# Altium PCB PCB1.PcbDoc
Units mm, origin at the board's own origin, x right, y up, seen from the top; angles counter-clockwise.
Board outline 59 x 38 mm, 4 copper layers (Top Layer, Int1 (GND), Int2 (PWR), Bottom Layer), stack 1.585 mm thick; 55 components, 40 nets, 219 pads, 132 vias.
Unrouted connection lines stored in the file: 2.
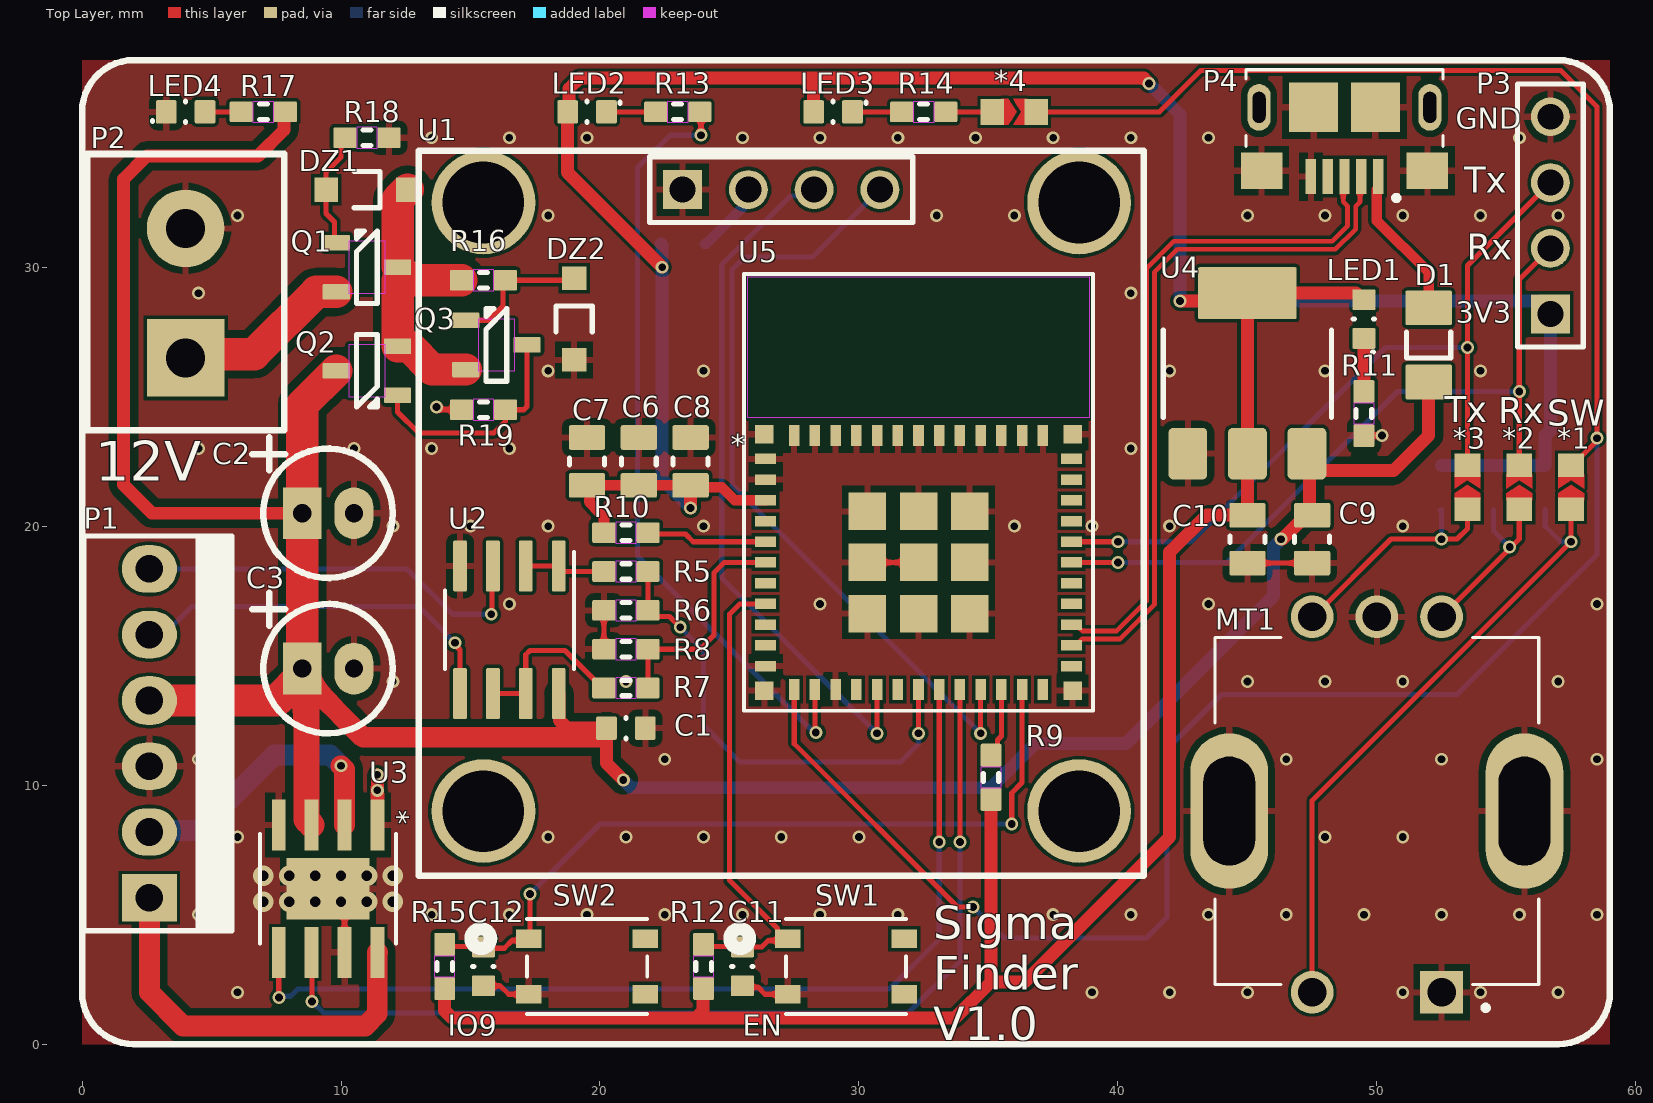
[diagram p0: Top Layer view]
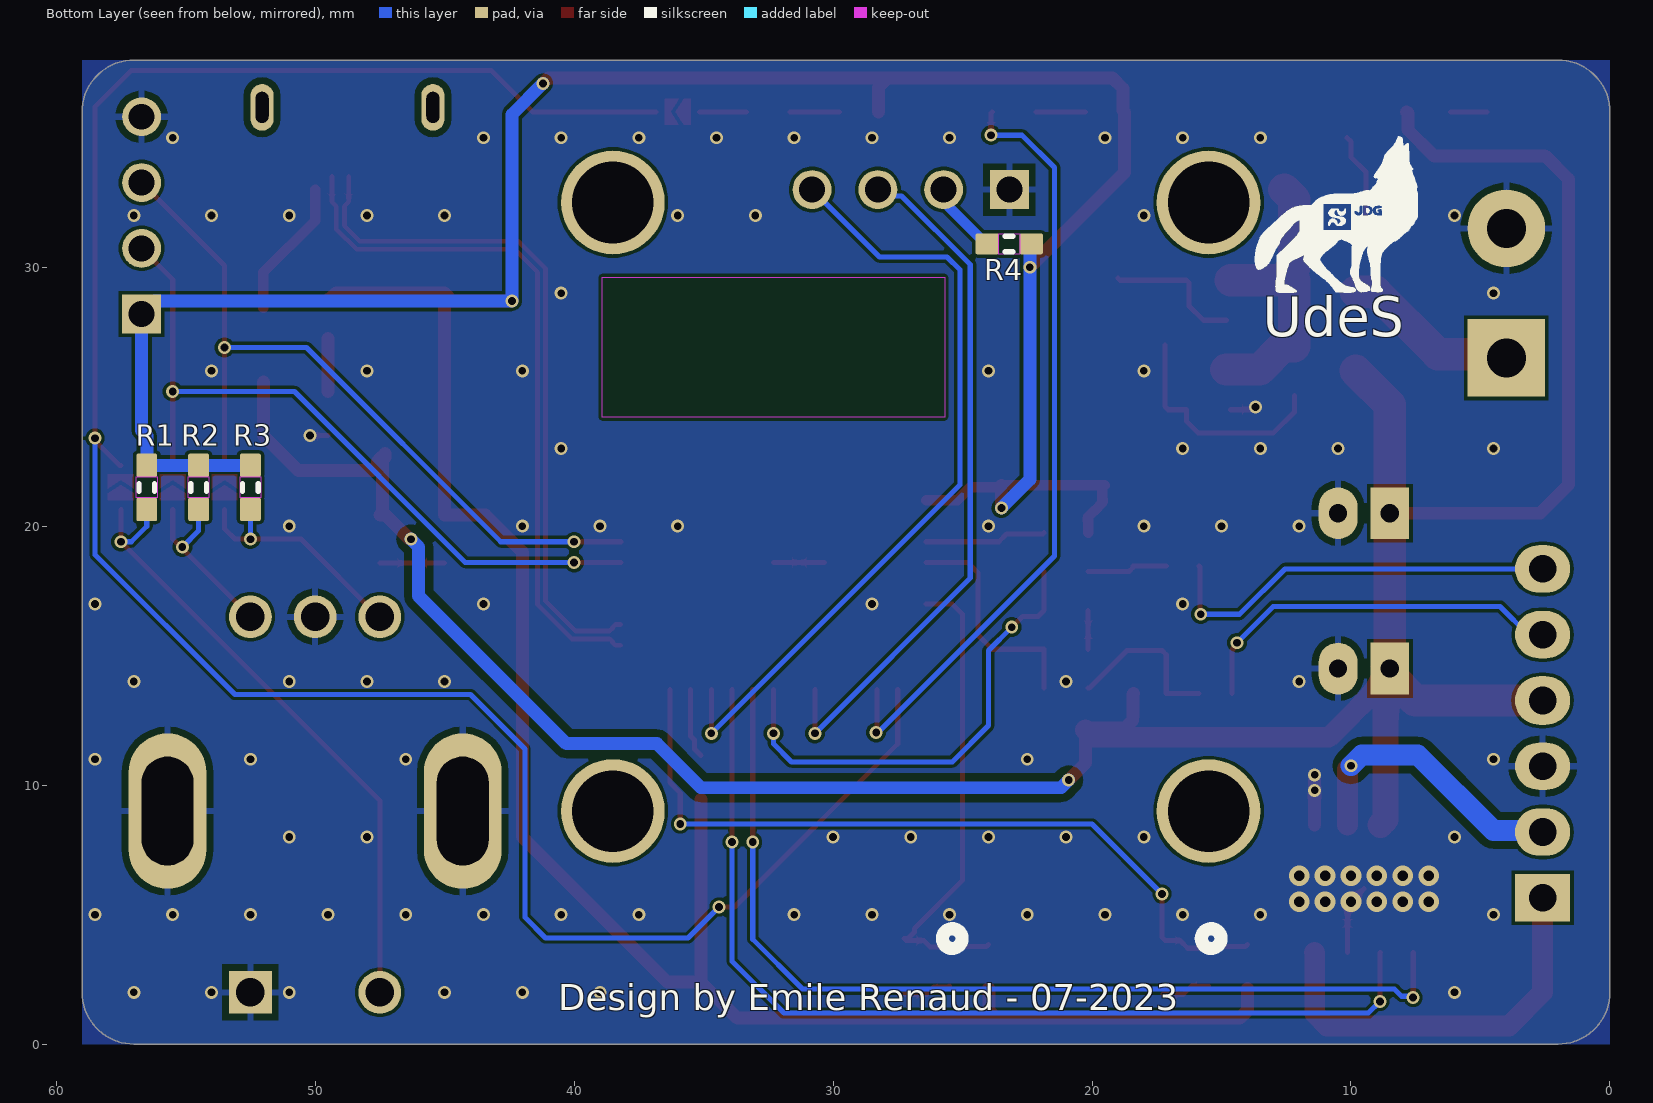
[diagram p1: Bottom Layer view, seen from below]
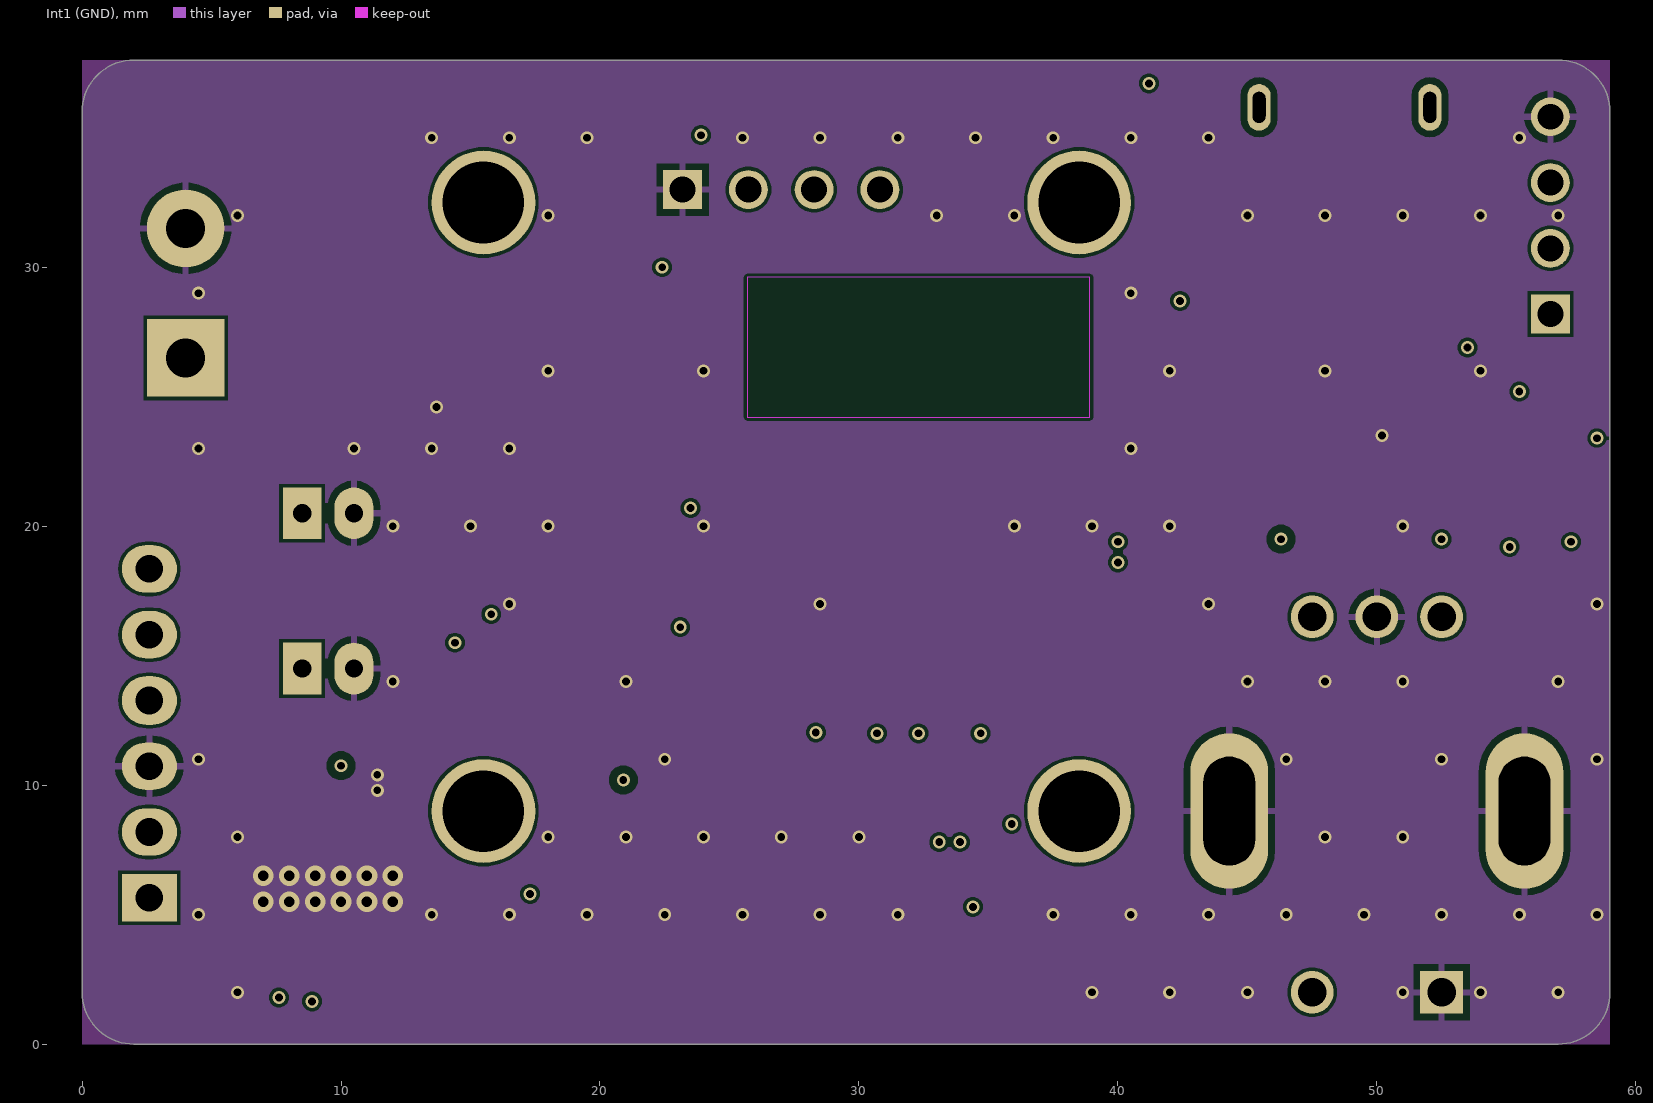
[diagram p2: Int1 (GND)]
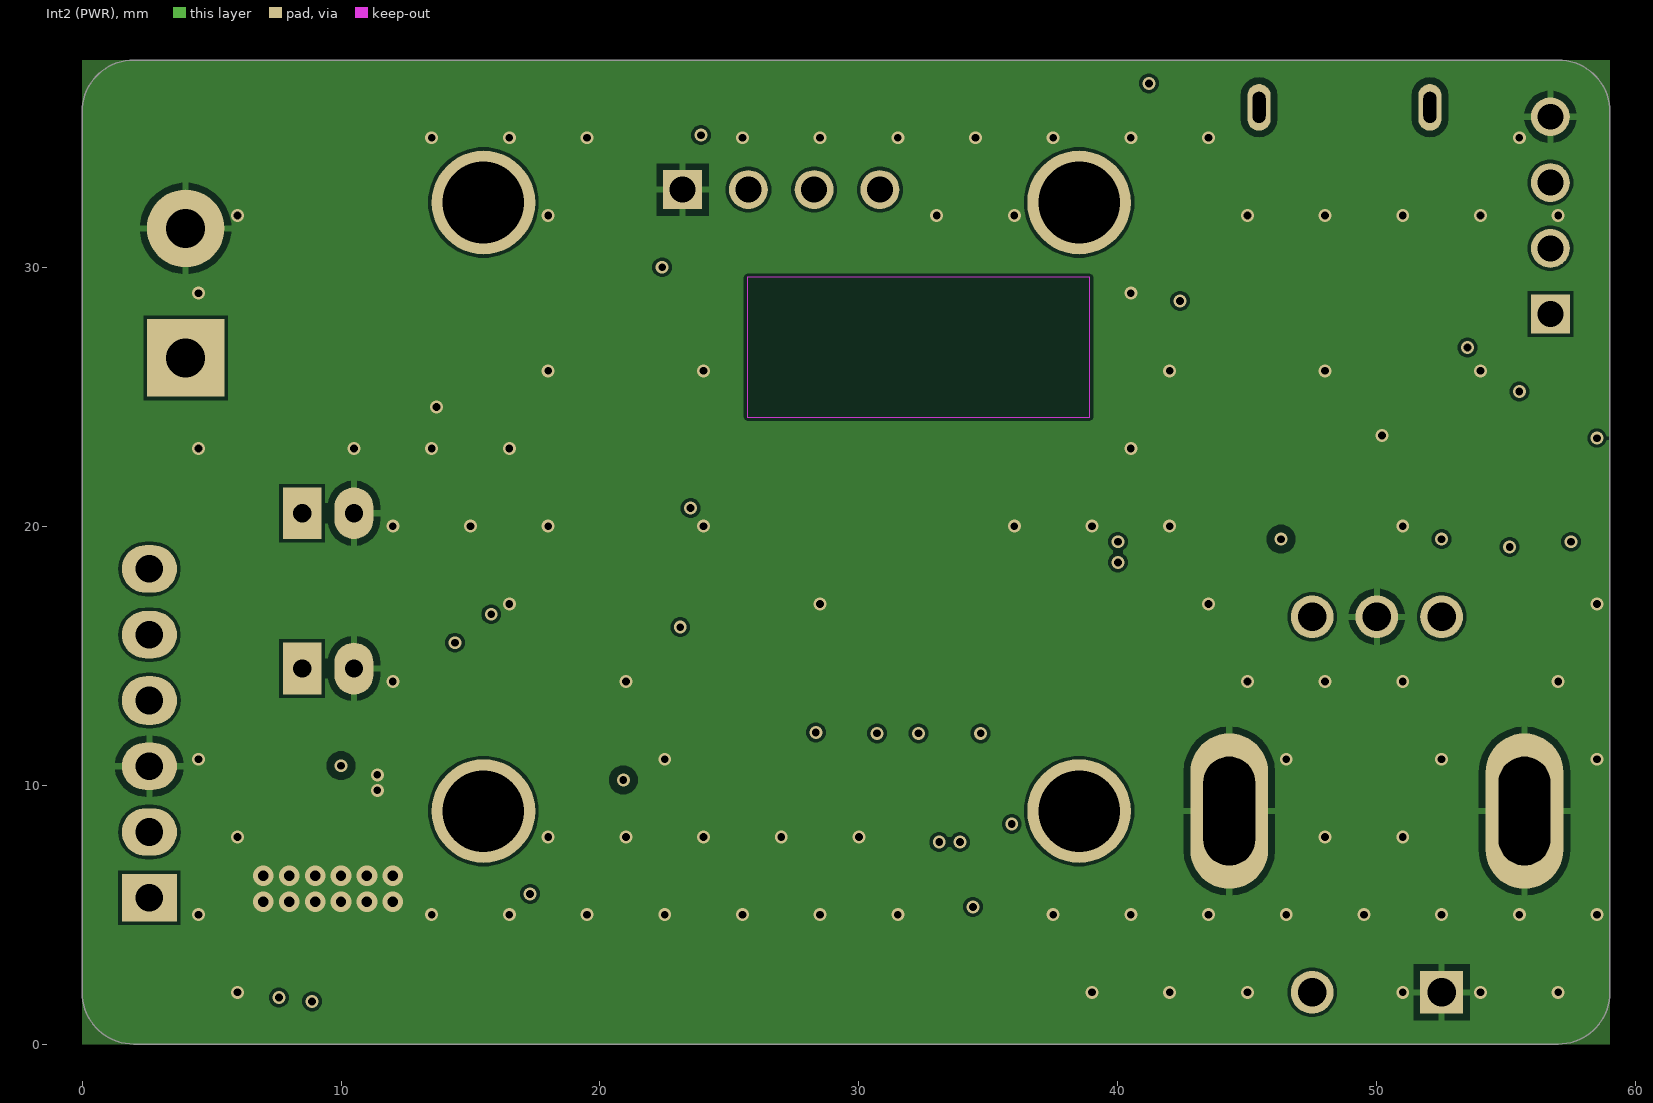
[diagram p3: Int2 (PWR)]
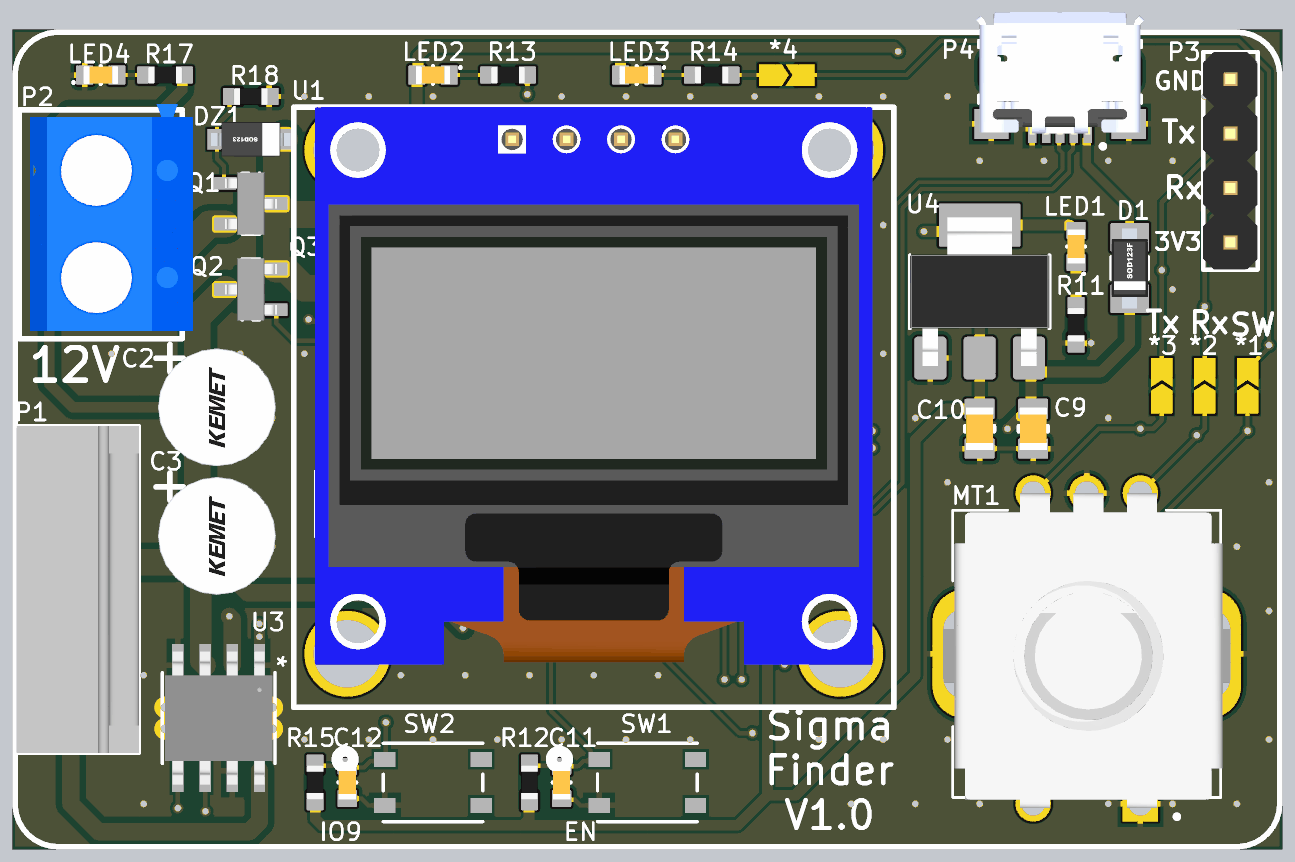
[diagram p4: 3D render of the assembled board from above, using the file's embedded part models]
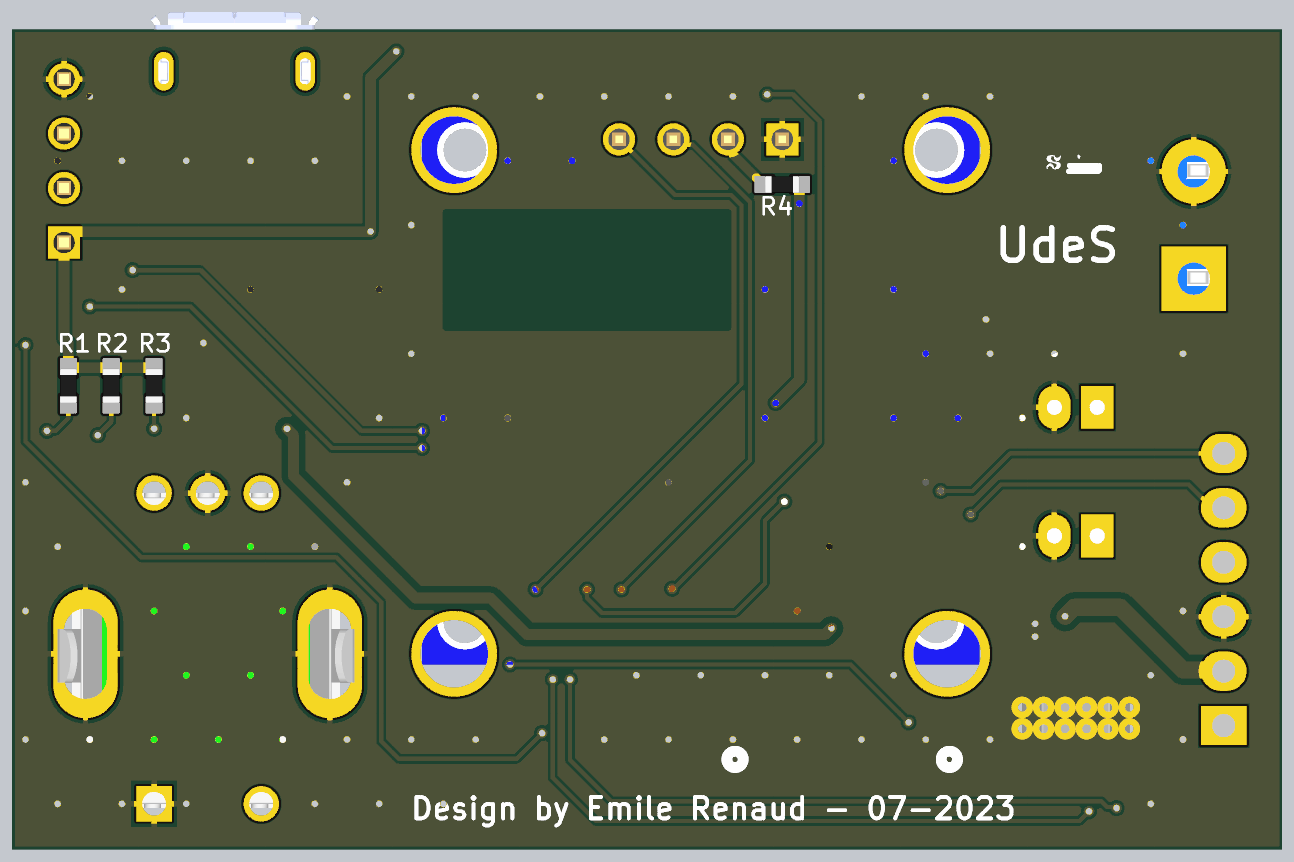
[diagram p5: 3D render of the assembled board from below, using the file's embedded part models]

## Layer stack, top to bottom
Top Solder: solder mask 0.035, SM-001, Dk 4
Top Layer: signal copper 0.035
Dielectric 2: prepreg 0.21, PP-017, Dk 4.6
Int1 (GND): signal copper 0.015
Dielectric 3: core 1.065, Core-039, Dk 4.6
Int2 (PWR): signal copper 0.015
Dielectric 4: prepreg 0.21, PP-017, Dk 4.6
Bottom Layer: signal copper 0.035
Bottom Solder: solder mask 0.035, SM-001, Dk 4

## Board outline
0,2 0,36 cw(c2,36) 2,38 57,38 cw(c57,36) 59,36 59,2 cw(c57,2) 57,0 2,0 cw(c2,2)

## Design rules (kind name [scope] priority, off if disabled: settings)
Clearance Clearance_Power [InNetClass('Power')] p1: gap=0.3 ignorepadtopadclearanceinfootprint=FALSE except(0.127: SMDPad-SMDPad SMDPad-THPad SMDPad-Via SMDPad-Fill SMDPad-Poly SMDPad-Region SMDPad-Text SMDPad-Hole THPad-THPad THPad-Via THPad-Fill THPad-Poly THPad-Region THPad-Text THPad-Hole)
Clearance Clearance_signal [All] p2: gap=0.125 ignorepadtopadclearanceinfootprint=FALSE
ComponentClearance [All] p1 off: gap=0.254 collisioncheckmode=3 verticalgap=0.254 showdistances=FALSE
DiffPairsRouting [InDifferentialPair('USB')] p1: maxlimit=0.254 minlimit=0.127 mostfreqgap=0.254 toplayer_maxgap=0.127 toplayer_prefgap=0.127 toplayer_minwidth=0.182 toplayer_maxwidth=0.182 toplayer_prefwidth=0.182 bottomlayer_maxgap=0.127 bottomlayer_prefgap=0.127 bottomlayer_minwidth=0.182 bottomlayer_maxwidth=0.182 bottomlayer_prefwidth=0.182 impedanceprofiledriven=TRUE impedanceprofileid={FA6609CF-BA32-4F74-B84B-CE5609EF71AF} impedanceprofilevalue=90.000000 maxuncoupledlength=12.7
HoleSize [All] p1 off: absolutevalues=TRUE maxlimit=2.54 minlimit=0.025 maxpercent=80.000 minpercent=20.000
MinimumSolderMaskSliver [All] p1 off: minsoldermaskwidth=0.254
PasteMaskExpansion [All] p1 off: expansion=0
PolygonConnect PolygonConnect_Power [InNetClass('Power')] p1: connectstyle=Direct reliefconductorwidth=0.254 reliefentries=4 polygonreliefangle="90 Angle" airgapwidth=0.254
PolygonConnect [All] p2: thpad.connectstyle=Relief thpad.reliefconductorwidth=0.254 thpad.reliefentries=4 thpad.polygonreliefangle="90 Angle" thpad.airgapwidth=0.254 smdpad.connectstyle=Relief smdpad.reliefconductorwidth=0.254 smdpad.reliefentries=4 smdpad.polygonreliefangle="90 Angle" smdpad.airgapwidth=0.254 via.connectstyle=Direct via.reliefconductorwidth=0.254 via.reliefentries=4 via.polygonreliefangle="90 Angle" via.airgapwidth=0.254
RoomDefinition main [InComponentClass('main')] p1: confinementstyle=ConfineIn formatcopy=TRUE lockcomponents=FALSE outline 122,-31 501,-31 501,10 122,10
RoutingVias [All] p1: holewidth=0.3 width=0.5 viastyle="Through Hole" minholewidth=0.15 minwidth=0.25 maxholewidth=1 maxwidth=1.3
SilkToSolderMaskClearance [IsPad] p1 off: minsilkscreentomaskgap=0.254 clearancetoexposedcopper=TRUE
SolderMaskExpansion [All] p1 off: expansion=0.102 istentingtop=FALSE
Width Width_Power(5A) [InNetClass('Power')] p1: maxlimit=2 minlimit=0.5 preferedwidth=1.25 minimp=50.000000 maximp=50.000000 favimp=50.000000
Width Width_signal [All] p2: maxlimit=1 minlimit=0.1 preferedwidth=0.2 minimp=50.000000 maximp=50.000000 favimp=50.000000
24 further rules are at their usual default settings.

## Classes and differential pairs
net class Power: +12 MOTOR_OUT_A6 MOTOR_OUT_B6 NetDZ1_2 NetP2_1
differential pair USB: +USB_P -USB_N

## Components (designator, comment, footprint, x,y, rotation, side; value= is the part's Value field where it differs from the comment)
*1 "NetTie_0603_Short" NetTie-0603-short 57.5,21.5 r270 top
*2 "NetTie_0603_Short" NetTie-0603-short 55.5,21.5 r270 top
*3 "NetTie_0603_Short" NetTie-0603-short 53.5,21.5 r270 top
*4 "NetTie_0603_Short" NetTie-0603-short 36,36 r180 top
C1 "Capacitor-0603-0.1uF-50V-X7R" CAPACITOR-0603 21,12.2 r180 top value=0.1uF
C2 "CAP ALUM 100UF 20% 25V RADIAL" CAPACITOR-Aluminium-5x11mm-2mmPitch 9.5,20.5 r90 top value=100uF
C3 "CAP ALUM 100UF 20% 25V RADIAL" CAPACITOR-Aluminium-5x11mm-2mmPitch 9.5,14.5 r90 top value=100uF
C6 "Capacitor-0805-10uF-35V-X5R" CAPACITOR-0805 21.5,22.5 r270 top value=10uF
C7 "Capacitor-0805-10uF-35V-X5R" CAPACITOR-0805 19.5,22.5 r270 top value=10uF
C8 "Capacitor-0805-10uF-35V-X5R" CAPACITOR-0805 23.5,22.5 r270 top value=10uF
C9 "Capacitor-0805-10uF-35V-X5R" CAPACITOR-0805 47.5,19.5 r90 top value=10uF
C10 "Capacitor-0805-10uF-35V-X5R" CAPACITOR-0805 45,19.5 r90 top value=10uF
C11 "Capacitor-0603-1uF-25V-X5R" CAPACITOR-0603 25.5,3 r90 top value=1uF
C12 "Capacitor-0603-1uF-25V-X5R" CAPACITOR-0603 15.5,3 r90 top value=1uF
D1 "SMD110PL-TP" SOD-123F 52,27 r270 top
DZ1 "BZT52C6V2-TP" SOD-123 11,33 r0 top
DZ2 "BZT52C13-TP" SOD-123 19,28 r90 top
LED1 "B1911USD-20D000114U1930" LED-0603-2PIN 49.5,28 r90 top
LED2 "B1911USD-20D000114U1930" LED-0603-2PIN 19.5,36 r180 top
LED3 "B1911USD-20D000114U1930" LED-0603-2PIN 29,36 r180 top
LED4 "B1911USD-20D000114U1930" LED-0603-2PIN 4,36 r0 top
MT1 "Rotary Encoder" XDCR_PEC11R-4215F-S0024 50,9 r180 top
P1 "640454-6" 640454-6 2.6,12 r90 top
P2 "2pos-TH-5.0mm" "Weco 2" 4,29 r90 top
P3 "UART" HDR1X4 56.7,32 r90 top
P4 "CONN RCPT USB2.0 MICRO B SMD R/A" FCI_10118193-0001LF 48.75,36.175 r180 top
Q1 "SSM3J332R" SOT-23-3 11,30 r270 top
Q2 "SSM3J332R" SOT-23-3 11,26 r90 top
Q3 "SSM3J332R" SOT-23-3 16,27 r270 top
R1 "SMT resistor" Resistor-0603 56.5,21.5 r270 bottom value=10k
R2 "SMT resistor" Resistor-0603 54.5,21.5 r270 bottom value=10k
R3 "SMT resistor" Resistor-0603 52.5,21.5 r270 bottom value=10k
R4 "SMT resistor" Resistor-0603 23.2,30.9 r0 bottom value=0
R5 "SMT resistor" Resistor-0603 21,18.25 r0 top value=1.69k
R6 "SMT resistor" Resistor-0603 21,16.75 r0 top value=3.3k
R7 "SMT resistor" Resistor-0603 21,13.75 r0 top value=1.69k
R8 "SMT resistor" Resistor-0603 21,15.25 r0 top value=3.3k
R9 "SMT resistor" Resistor-0603 35.1,10.3 r90 top value=10k
R10 "SMT resistor" Resistor-0603 21,19.75 r0 top value=10k
R11 "SMT resistor" Resistor-0603 49.5,24.35 r90 top value=1k
R12 "SMT resistor" Resistor-0603 24,3 r270 top value=10k
R13 "SMT resistor" Resistor-0603 23,36 r180 top value=1k
R14 "SMT resistor" Resistor-0603 32.5,36 r180 top value=1k
R15 "SMT resistor" Resistor-0603 14,3 r270 top value=10k
R16 "SMT resistor" Resistor-0603 15.5,29.5 r180 top value=10k
R17 "SMT resistor" Resistor-0603 7,36 r0 top value=1k
R18 "SMT resistor" Resistor-0603 11,35 r180 top value=10k
R19 "SMT resistor" Resistor-0603 15.5,24.5 r0 top value=10k
SW1 "PTS815 SJM 250 SMTR LFS" "SW4_PTS815 SJM 250 SMTR LFS_CNK" 29.5,3 r90 top
SW2 "PTS815 SJM 250 SMTR LFS" "SW4_PTS815 SJM 250 SMTR LFS_CNK" 19.5,3 r90 top
U1 "OLED096" OLED096 27,33 r0 top locked value=N/A
U2 "LM358DR" SOIC-8 16.5,16 r180 top
U3 "BD62130AEFJ-E2" P-HSOP8 9.5,6 r270 top
U4 "NCV1117ST33T3G" SOT-223-3/TO-261-3S 45,22.8 r0 top
U5 "ESP32-C3-MINI-1-H4" ESP32-C3-MINI-1_EXP 32.3,21.305 r0 top

## Footprints (in the part's own frame and the unit in brackets; to place one, negate y for a bottom-side part, rotate by r counter-clockwise, add the part's x,y. Pads: shape width x height; smd on the part's side, far side on the other; paste and mask are expansions set on the pad)
640454-6 [mil] "CONN HEADER MTA-100 VERT 6POS .100"
  rect 72x84 hole 42: 1(-250,0)
  oval 72x84 hole 42: 2(-150,0) 3(-50,0) 5(150,0) 6(250,0)
  oval 74x84 hole 42: 4(50,0)
  silkscreen extent -300,-125 300,100, body extent -300,-125 300,100, height 395
CAPACITOR-0603 [mm] "Metric 1608, EIA 0603. Per Yageo Product Specification V2.2"
  rrect15% 0.8x0.9 smd: 1(-0.75,0) 2(0.75,0)
  Top Layer pour cut-out: -0.35,0.45 0.35,0.45 0.35,-0.45 -0.35,-0.45
  silkscreen extent 0,-0.41 0,0.41, body extent -0.93,-0.41 0.93,0.41, height 0.81
CAPACITOR-0805 [mm] "Metric 2012, EIA 0805, Per Yageo Product Specification V2.2"
  rrect15% 0.95x1.4 smd: 1(-0.925,0) 2(0.925,0)
  silkscreen extent -0.13,-0.67 0.13,0.67, body extent -1.09,-0.64 1.09,0.64, height 1.26
CAPACITOR-Aluminium-5x11mm-2mmPitch [mm] "5mm dia x 11mm height Capacitor"
  rect 2x1.5 hole 0.7: 1(0,1)
  oval 2x1.5 hole 0.7: 2(0,-1)
  silkscreen extent -2.5,-2.5 2.94,2.93, body extent -2.75,-2.67 2.75,2.83, height 12.61
ESP32-C3-MINI-1_EXP [mil]
  rect 32x16 smd paste+0 mask+0: 1(-232.28,50.98) 2(-232.28,19.48) 3(-232.28,-12.01) 4(-232.28,-43.51) 5(-232.28,-75) 6(-232.28,-106.5) 7(-232.28,-138) 8(-232.28,-169.49) 9(-232.28,-200.99) 10(-232.28,-232.48) 11(-232.28,-263.98) 25(232.28,-263.98) 26(232.28,-232.48) 27(232.28,-200.99) 28(232.28,-169.49) 29(232.28,-138) 30(232.28,-106.5) 31(232.28,-75) 32(232.28,-43.51) 33(232.28,-12.01) 34(232.28,19.48) 35(232.28,50.98)
  rect 16x32 smd paste+0 mask+0: 12(-188.98,-299.41) 13(-157.48,-299.41) 14(-125.98,-299.41) 15(-94.49,-299.41) 16(-62.99,-299.41) 17(-31.5,-299.41) 18(0,-299.41) 19(31.5,-299.41) 20(62.99,-299.41) 21(94.49,-299.41) 22(125.98,-299.41) 23(157.48,-299.41) 24(188.98,-299.41) 36(188.98,86.41) 37(157.48,86.41) 38(125.98,86.41) 39(94.49,86.41) 40(62.99,86.41) 41(31.5,86.41) 42(0,86.41) 43(-31.5,86.41) 44(-62.99,86.41) 45(-94.49,86.41) 46(-125.98,86.41) 47(-157.48,86.41) 48(-188.98,86.41)
  rect 57x57 smd: 49(0,-106.5) 54(77.76,-28.74) 55(77.76,-106.5) 56(77.76,-184.26) 57(0,-184.26) 58(-77.76,-184.26) 59(-77.76,-106.5) 60(-77.76,-28.74) 61(0,-28.74)
  rect 28x28 smd: 50(234.25,88.38) 51(234.25,-301.38) 52(-234.25,-301.38) 53(-234.25,88.38)
  Keep-Out Layer region: 260,327 -260,327 -260,114 260,114
  silkscreen extent -265,-332 265,332, body extent -259,-327 261,327, height 100
FCI_10118193-0001LF [mm]
  rect 0.4x1.35 smd: 1(-1.3,2.675) 2(-0.65,2.675) 3(0,2.675) 4(0.65,2.675) 5(1.3,2.675)
  rect 1.6x1.4 smd: S1(-3.2,2.45) S2(3.2,2.45)
  rect 1.9x1.9 smd: S3(1.2,0) S4(-1.2,0)
  oval 0.9x1.8 hole 0.5 slot 1.2 at 90 deg: S5(-3.3,0) S6(3.3,0)
  round 0.5 hole 0.5 unplated: ""(-3.3,0) ""(3.3,0)
  silkscreen extent -3.8,-1.45 3.8,3.6, body extent -3.93,-2.76 3.93,2.95, height 2.85
HDR1X4 [mm] "Connector; Header; 2 Position"
  rect 1.5x1.5 hole 1: 1(-3.81,0)
  round 1.5 hole 1: 2(-1.27,0) 3(1.27,0) 4(3.81,0)
  silkscreen extent -5.08,-1.27 5.08,1.27, body extent -5.08,-1.27 5.08,1.27, height 8.54
LED-0603-2PIN [mm] "Metric 1608, EIA 0603. Per Yageo Product Specification V2.2"
  rrect15% 0.8x0.9 smd: 1(-0.75,0) 2(0.75,0)
  Top Layer pour cut-out: -0.35,0.45 0.35,0.45 0.35,-0.45 -0.35,-0.45
  silkscreen extent -1.28,-0.41 0,0.41, body extent -0.93,-0.41 0.93,0.41, height 0.81
NetTie-0603-short [mm] "Net Tie with an EIA 0603 land pattern"
  rect 0.9x1 smd paste-1 mask+0.102: 1(-0.85,0) 2(0.85,0)
  Top Layer region: 0.5,0.5 0.225,0.5 0.1,0.3 -0.1,0 0.1,-0.3 0.225,-0.5 0.5,-0.5
  Top Layer region: -0.5,0.5 0.05,0.5 -0.075,0.3 -0.275,0 -0.075,-0.3 0.05,-0.5 -0.5,-0.5
OLED096 [mm] "OLED096"
  round 4 hole 3.15: 0(-11.5,-24) 0(-11.5,-0.5) 0(11.5,-24) 0(11.5,-0.5)
  rect 1.5x1.5 hole 1: 1(-3.81,0)
  round 1.5 hole 1: 2(-1.27,0) 3(1.27,0) 4(3.81,0)
  silkscreen extent -14,-26.5 14,1.5, body extent -13,-24.5 13,1.5, height 5.66
P-HSOP8 [mil]
  rect 78x21 smd paste+0 mask+0: 1(-97,75) 2(-97,25) 3(-97,-25) 4(-97,-75) 5(97,-75) 6(97,-25) 7(97,25) 8(97,75)
  rect 94x126 smd paste-62.5 mask+0: EPAD(0,0)
  silkscreen extent -84,-104 84,104, body extent -122,-99 122,99, height 67
Resistor-0603 [mm] "Metric 1608, EIA 0603 Drawn per Yageo \"Chip resistors Mounting\" rev 10"
  rrect15% 0.9x0.8 smd: 1(-0.85,0) 2(0.85,0)
  Top Layer pour cut-out: -0.4,0.4 0.4,0.4 0.4,-0.4 -0.4,-0.4
  Top Layer keep-out region: -0.4,0.4 0.4,0.4 0.4,-0.4 -0.4,-0.4
  silkscreen extent -0.15,-0.3 0.15,0.3, body extent -0.8,-0.4 0.8,0.4, height 0.55
SOD-123 [mm] "SOD-123. From Diodes DDZ6V2B-7 datasheet"
  rect 0.9x0.95 smd: 1(-1.575,0) 2(1.575,0)
  silkscreen extent -0.5,-0.7 0.5,0.7, body extent -1.85,-0.8 1.85,0.8, height 1.27
SOD-123F [mm] "SOD-123F from https://www.diodes.com/assets/Package-Files/SOD123F.pdf on 2017-03-16"
  rrect10% 1.34x1.8 smd: 1(-1.43,0) 2(1.43,0)
  silkscreen extent -0.5,-0.85 0.5,0.85, body extent -1.85,-0.85 1.9,0.85, height 1.22
SOIC-8 [mil] "8-Lead Plastic Small Outline, 0.15in pitch,  LTC DWG # 05-08-1610 Rev G"
  rrect25% 21x78 smd: 1(-75,-97) 2(-25,-97) 3(25,-97) 4(75,-97) 5(75,97) 6(25,97) 7(-25,97) 8(-75,97)
  silkscreen extent -98,-118 98,60, body extent -98,-122 98,122, height 69
SOT-23-3 [mm] "SOT23-3, from TI DBZ (R-PDSO-G3)"
  rrect15% 0.6x1.05 smd: 1(-0.95,-1.185) 2(0.95,-1.185) 3(0,1.185)
  Top Layer keep-out region: -1,-0.7 1,-0.7 1,0.7 -1,0.7
  silkscreen extent -1.4,-0.4 1.4,0.4, body extent -1.45,-1.21 1.45,1.21, height 0.98
SOT-223-3/TO-261-3S [mm] "TO-261-3 / SOT-223-3 from Infineon IPN80R600P7 Datasheet, rev 2,1"
  rrect25% 1.5x2 smd: 1(-2.3,0) 2(0,0) 3(2.3,0)
  rrect5% 3.8x2 smd: 4(0,6.2)
  silkscreen extent -3.25,1.4 3.25,4.78, body extent -3.25,-0.37 3.25,6.57, height 1.64
"SW4_PTS815 SJM 250 SMTR LFS_CNK" [mm]
  rect 0.711x0.991 smd paste+0 mask+0: 1(1.075,2.25) 2(1.075,-2.25) 3(-1.075,2.25) 4(-1.075,-2.25)
  silkscreen extent -1.83,-2.32 1.83,4.48, body extent 0,-0.25 0.25,0, height 0.25
"Weco 2" [mm]
  rect 3x3 hole 1.5: 1(-2.5,0)
  round 3 hole 1.5: 2(2.5,0)
  silkscreen extent -5.29,-3.81 5.37,3.81, body extent -4.95,-4.3 5.65,3.3, height 10
XDCR_PEC11R-4215F-S0024 [mm]
  rect 1.65x1.65 hole 1.1: 1(-2.5,7)
  round 1.65 hole 1.1: 2(2.5,7) A(-2.5,-7.5) B(2.5,-7.5) COM(0,-7.5)
  oval 3x6 hole 2 slot 4.2 at 90 deg: S1(-5.7,0) S2(5.7,0)
  silkscreen extent -6.25,-6.7 6.25,7.7, body extent -7,-7.5 6.85,7.2, height 21.5

## Part data
C1: Package / Case="Metric 1608, EIA 0603", Supplier Part Number 1=1276-1935-2-ND, Volt=50V, Mounted=Yes, Precision=X7R-10%, Supplier 1=Digi-Key, Supplier 2=Digi-Key, Supplier 3=Digi-Key, Supplier 4=Digi-Key, Supplier Part Number 2=1276-1934-2-ND
C2 C3: library part Capacitor-100uF-25V, Supplier Part Number 1=399-6102-ND, Volt=25V, Mounted=Yes, Precision=20%, Supplier 1=Digi-Key, Supplier 2=Digi-Key, Supplier 3=Digi-Key, Supplier 4=Digi-Key
C6 C7 C8 C9 C10: Package / Case="Metric 2012 , EIA 0805", Supplier Part Number 1=490-10515-1-ND, Volt=35V, Mounted=Yes, Precision=X5R-10%, Supplier 1=Digi-Key, Supplier 2=Digi-Key, Supplier 3=Digi-Key, Supplier 4=Digi-Key
C11 C12: Package / Case="Metric 1608, EIA 0603", Supplier Part Number 1=1276-1859-2-ND, Volt=25V, Mounted=Yes, Precision=X5R-10%, Supplier 1=Digi-Key, Supplier 2=Digi-Key, Supplier 3=Digi-Key, Supplier 4=Digi-Key, Supplier Part Number 2=1276-1942-2-ND
D1: "DIODE SCHOTTKY 100V 1A SOD123FL", Package / Case=SOD123FL, Supplier Part Number 1=SMD110PL-TPMSTR-ND, Volt=100V, Mounted=Yes, Supplier 1=Digi-Key
DZ1: "Zener Diode 6.2 V 200 mW ±6% Surface Mount SOD-123", Package / Case=SOD-123, Supplier Part Number 1=BZT52C13-TPMSCT-ND, Volt=6.2V, Grade=None, Mounted=Yes, Precision=6%, Supplier 1=Digi-Key, Watt=200mW
DZ2: "Zener Diode 13 V 200 mW ±6% Surface Mount SOD-123", Package / Case=SOD-123, Supplier Part Number 1=BZT52C13-TPMSCT-ND, Volt=13V, Grade=None, Mounted=Yes, Precision=6%, Supplier 1=Digi-Key, Watt=200mW
LED1 LED2 LED3 LED4: "LED RED CLEAR 1608 SMD", Package / Case="0603 (1608 Metric)", Supplier Part Number 1=3147-B1911USD-20D000114U1930CT-ND, Mounted=Yes, Supplier 1=Digi-Key
MT1: library part PEC11R-4215F-S0024, "Incremental Encoder, 12 Mm, Contact Rating 10 Ma - 5 Vdc", Package=None, Availability=Unavailable, MP=PEC11R-4215F-S0024, Price=None
P1: "CONN HEADER VERT 6POS .100 TIN", Color=Natural, Manufacturer="TE Connectivity AMP Connectors", Supplier Part Number 1=A19433-ND, Category="Connectors, Interconnects", ComponentLink1Description=http://www.te.com/commerce/DocumentDelivery/DDEController?Action=srchrtrv&DocNm=640454&DocType=Customer+Drawing&DocLang=English, ComponentLink1URL=http://www.te.com/commerce/DocumentDelivery/DDEController?Action=srchrtrv&DocNm=640454&DocType=Customer+Drawing&DocLang=English, Connector Type="Header, Unshrouded", Contact Finish=Tin, Contact Finish Thickness=-, Contact Mating Length="0.295\" (7.49mm)", Contact Type="Male Pin", Fastening Type=-, Features="Polarizing Key", Manufacturer Part Number=640454-6, Mounting Type="Through Hole", Number of Positions=6, Number of Positions Loaded=All, Number of Rows=1, Packaging=Bulk, Part Status=Active, Pitch="0.100\" (2.54mm)", Row Spacing=-, Supplier 1=Digi-Key, Termination=Solder
P2: "2pos-TH-5.0mm Screw Terminal", Package / Case=TH, Supplier Part Number 1=N/A277-1667-ND, Volt=N/A, Mounted=Yes, Supplier 1=Digi-Key
P3: library part 4pos-TH-2.54mm, "4pos TH 2.54mm Header", Package / Case=TH, Supplier Part Number 1=N/A, Mounted=Yes, Supplier 1=Digi-Key, Volt=N/A
P4: library part USB-Micro, "USB - micro B USB 2.0 Receptacle Connector 5 Position Surface Mount, Right Angle; Through Hole", Package / Case=SMD, Supplier Part Number 1=609-4616-2-ND, Volt=N/A, Mounted=Yes, Supplier 1=Digikey
Q1 Q2 Q3: "P-Channel 30 V 6A (Ta) 1W (Ta) Surface Mount SOT-23F", Current=6A, Package / Case=SOT-523, Supplier Part Number 1=SSM3J332RLFCT-ND, Volt=30V, Mounted=Yes, Supplier 1=Digi-Key
R1 R2 R3 R9 R10 R12 R15 R16 R18 R19: library part Resistor0603-10k, "Resistor0603-10k", Package / Case="Metric 1608, EIA 0603", Supplier Part Number 1=311-10.0KHRTR-ND, Mounted=Yes, Precision=1%, Supplier 1=Digi-Key, Supplier 2=Digi-Key, Supplier 3=Digi-Key, Supplier 4=Digi-Key, Supplier Part Number 2=RMCF0603FT10K0TR-ND, Watt=0.1W
R4: library part Resistor0603-0.0, "Resistor0603-0.0", Package / Case="Metric 1608, EIA 0603", Supplier Part Number 1=RMCF0603ZT0R00TR-ND, Mounted=Yes, Precision=1%, Supplier 1=Digi-Key, Supplier 2=Digi-Key, Supplier 3=Digi-Key, Supplier 4=Digi-Key, Supplier Part Number 2=1276-3510-2-ND, Supplier Part Number 3=YAG1307TR-ND, Supplier Part Number 4=541-0.0GTR-ND, Watt=0.1W
R5 R7: library part Resistor0603-1.69k, "Resistor0603-1.69k", Package / Case="Metric 1608, EIA 0603", Supplier Part Number 1=RMCF0603FT1K69CT-ND, Mounted=Yes, Precision=1%, Supplier 1=Digi-Key, Supplier 2=Digi-Key, Supplier 3=Digi-Key, Supplier 4=Digi-Key, Watt=0.25W
R6 R8: library part Resistor0603-3.3k, "Resistor0603-3.3k", Package / Case="Metric 1608, EIA 0603", Supplier Part Number 1=311-3.30KHRCT-ND, Mounted=Yes, Precision=5%, Supplier 1=Digi-Key, Supplier 2=Digi-Key, Supplier 3=Digi-Key, Supplier 4=Digi-Key, Watt=0.25W
R11 R13 R14 R17: library part Resistor0603-1k, "Resistor0603-1k", Package / Case="Metric 1608, EIA 0603", Supplier Part Number 1=RMCF0603FT1K00TR-ND, Mounted=Yes, Precision=1%, Supplier 1=Digi-Key, Supplier 2=Digi-Key, Supplier 3=Digi-Key, Supplier 4=Digi-Key, Supplier Part Number 2=311-1.00KHRTR-ND, Supplier Part Number 3=AG1307TR-ND, Watt=0.1W
SW1 SW2: "TACT 4.2 X 3.2, 2.5 MM H, 180GF,", Current=0.05A, Supplier Part Number 1=CKN12215-1-ND, Volt=12V, Mounted=Yes, Supplier 1=Digi-Key
U1: "OLED Display I2C 0.96in", Package / Case="0603 (1608 Metric)", Mounted=Yes, Precision=3%, Supplier 1=Amazon, Supplier Part Number 1=https://www.amazon.ca/-/fr/SSD1306-broches-Arduino-Raspberry-jaune-bleu-IIC/dp/B076PNP2VD/ref=sr_1_5?crid=2VV3LXPB89L69&keywords=i2c+oled&qid=1687918090&sprefix=%2Caps%2C88&sr=8-5
U2: "IC OPAMP GP 2 CIRCUIT 8SOIC", Package / Case=SOIC-8, Supplier Part Number 1=296-1014-2-ND, Grade=None, helpURL=https://www.digikey.ca/en/products/detail/texas-instruments/LM358DR/276658?s=N4IgTCBcDa4JwDYC0BGADCgLEsSByAIiALoC%2BQA, Mounted=Yes, Supplier 1=Digi-Key
U3: "1 CHANNEL H BRIDGE Motor. 28V, 3A", Package / Case=8-HTSOP-J, Supplier Part Number 1=BD62130AEFJ-E2CT-ND, Mounted=Yes, Supplier 1=Digi-Key
U4: "IC REG LINEAR 3.3V 1A SOT223", Package / Case=SOT223, Supplier Part Number 1=NCV1117ST33T3GOSCT-ND, Mounted=Yes, Supplier 1=Digi-Key
U5: library part ESP32-C3-MINI-1-N4, "Bluetooth, WiFi 802.11b/g/n, Bluetooth v5.0 Transceiver Module 2.412GHz ~ 2.484GHz PCB Trace Surface Mount", Mfr_Name="Espressif Systems", Copyright="Copyright (C) 2023 Ultra Librarian. All rights reserved.", Datasheet=https://www.espressif.com/sites/default/files/documentation/esp32-c3-mini-1_datasheet_en.pdf, Manufacturer_Part_Number=ESP32-C3-MINI-1-N4, RefDes=RefDes, Type=Type

## Via types
v1: diameter 0.5, hole 0.3, Top Layer to Bottom Layer, tented both sides, 120 vias
v2: diameter 0.8, hole 0.4, Top Layer to Bottom Layer, 12 vias

## Nets (pads, with @x,y where several pads share a name; then routed paths per layer and width w, separated by ;. In a path a pad name is that pad's centre, name@x,y a point inside that pad or via, vN(x,y) a via of type N, cw(c..) or ccw(c..) an arc to the next point about the centre after c; other vN are vias at no path point)
+3.3: C6.2 C7.2 C8.2 C10.2 LED1.2 LED2.2 LED3.2 P3.1 R1.1 R2.1 R3.1 R4.1 R9.1 R10.1 R12.2 R15.2 U4.2 U4.4 U5.3 | length 157.4
  Top Layer w0.4: R10.1 20.15,20.366 19.916,20.6 19.9,20.6 19.6,20.9 19.6,21.475 C7.2 C6.2 C8.2 23.575,21.5 24.7,21.5 25.2,21 U5.3
  Top Layer w0.5: R15.2 14,1.293 14.293,1 23.689,1 ; v1(22.4,30) 18.75,33.65 LED2.2 18.8,36.05 18.8,36.9 19.2,37.3 27.9,37.3 ; v1(23.5,20.7) C8.2 ; R12.2 23.982,2.132 23.982,1.293 23.689,1 ; LED3.2 28.25,36.95 27.9,37.3 ; R9.1 35.1,2.4 ; v1(41.2,37.1) 41,37.3 27.9,37.3 ; v1(42.4,28.7) 44.7,28.7 U4.4 ; LED1.2 49.45,28.75 49.2,29 U4.4 ; 23.689,1 33.7,1 35.1,2.4 ; 35.1,2.4 36.4,2.4 42,8 42,19 43.425,20.425 C10.2 U4.2 U4.4
  Bottom Layer w0.5: R4.1 22.4,30.85 v1(22.4,30) 22.4,21.8 v1(23.5,20.7) ; v1(41.2,37.1) 42.4,35.9 v1(42.4,28.7) 42.41,28.69 56.2,28.69 P3.1 56.7,25.2 56.7,23.7 56.5,23.5 R1.1 R2.1 R3.1
+12: C1.2 C2.1 C3.1 C9.2 D1.2 P1.4 Q2.3 R17.2 U2.8 U3.3 U4.3 | length 112
  Top Layer w0.5: R17.2 7.8,35.95 7.8,35.3 6.8,34.3 2.5,34.3 1.6,33.4 1.6,21.6 2.7,20.5 C2.1 ; U2.8@18.405,13.532 18.422,13.516 18.422,12.655 18.427,12.649 18.427,12.506 18.72,12.213 C1.2@20.25,12.213 ; C1.2 20.25,12.126 20.25,10.85 v1(20.9,10.2) ; v1(46.3,19.5) 46.35,19.5 47.275,20.425 C9.2 47.4,20.525 U4.3@47.4,22.5 ; U4.3@47.5,22.35 U4.3@47.5,22.45 ; U4.3@47.6,22.5 U4.3@47.5,22.6 ; D1.2 52,23.5 50.65,22.15 47.8,22.15 U4.3@47.5,22.45 ; U4.3@47.5,22.45 47.3,22.65 U4.3 U4.3@47.5,22.6 ; U4.3@47.5,22.45 U4.3@47.5,22.6
  Top Layer w0.8: C3.1 8.5,14.25 8.662,14.088 9.05,13.7 9.05,13.649 10.854,11.846 19.97,11.846 C1.2@20.25,12.126
  Top Layer w1: C3.1@8.662,14.088 8.662,8.667 U3.3
  Top Layer w1.25: P1.4 7.52,13.27 C3.1@8.5,14.25 ; C3.1 C2.1 8.5,24.685 Q2.3
  Bottom Layer w0.5: v1(20.9,10.2) 21.2,9.9 35.1,9.9 36.8,11.6 40.3,11.6 46,17.3 46,19.2 v1(46.3,19.5)
EN: C11.2 R12.1 SW1.1 U5.8 | length 18.4
  Top Layer w0.2: R12.1 24.075,3.775 25.475,3.775 C11.2 26.25,3.75 26.5,4 SW1.1@27.175,4 ; U5.8 25.4,17 25,16.6 25,6.325 26.855,4.47 26.855,4.331 27.11,4.075 SW1.1
GND: C1.1 C2.2 C3.2 C6.1 C7.1 C8.1 C9.1 C10.1 C11.1 C12.1 DZ2.1 LED4.1 MT1.1 MT1.COM MT1.S1 MT1.S2 P1.3 P2.2 P3.4 P4.5 P4.S1 P4.S2 P4.S3 P4.S4 P4.S5 P4.S6 R6.1 R8.1 R11.1 R18.1 R19.1 SW1.3 SW2.3 U1.1 U2.4 U3.1 U3.4 U3.7 U3.EPAD U4.1 U5.1 U5.2 U5.11 U5.14 U5.36 U5.37 U5.38 U5.39 U5.40 U5.41 U5.42 U5.43 U5.44 U5.45 U5.46 U5.47 U5.48 U5.49 U5.50 U5.51 U5.52 U5.53 U5.54 U5.55 U5.56 U5.57 U5.58 U5.59 U5.60 U5.61 | length 16.1
  Top Layer w0.2: U3.EPAD 10.135,5.365 U3.7 ; v1(13.691,24.601) 13.772,24.601 13.874,24.5 R19.1 ; C12.1 16.15,2.25 16.475,1.925 SW2.3 ; R8.1 R6.1 ; C11.1 25.55,2.2 26.1,2.2 26.375,1.925 SW1.3 ; U5.59 U5.49 ; C10.1 C9.1 ; R11.1 v1(50.2,23.5)
  Top Layer w0.5: v1(11.4,10.4) 11.4,8.469 U3.1
  other v1: 6,2 39,2 42,2 45,2 51,2 54,2 57,2 4.5,5 13.5,5 16.5,5 19.5,5 22.5,5 25.5,5 28.5,5 31.5,5 37.5,5 40.5,5 43.5,5 46.5,5 49.5,5 52.5,5 55.5,5 58.5,5 6,8 18,8 21,8 24,8 27,8 30,8 48,8 51,8 11.4,9.8 4.5,11 22.5,11 46.5,11 52.5,11 58.5,11 12,14 21,14 45,14 48,14 51,14 57,14 16.5,17 28.5,17 43.5,17 58.5,17 12,20 15,20 18,20 24,20 36,20 39,20 42,20 51,20 4.5,23 10.5,23 13.5,23 16.5,23 40.5,23 18,26 24,26 42,26 48,26 54,26 4.5,29 40.5,29 6,32 18,32 33,32 36,32 45,32 48,32 51,32 54,32 57,32 13.5,35 16.5,35 19.5,35 25.5,35 28.5,35 31.5,35 34.5,35 37.5,35 40.5,35 43.5,35 55.5,35
  other v2: 7,5.5 8,5.5 9,5.5 10,5.5 11,5.5 12,5.5 7,6.5 8,6.5 9,6.5 10,6.5 11,6.5 12,6.5
IO0: *1.1 *4.1 U5.12 | length 87.8
  Top Layer w0.2: U5.12 27.5,11.6 33.8,5.3 v1(34.4,5.3) ; *4.1 41.6,36 43.2,37.6 57.1,37.6 58.5,36.2 v1(58.5,23.4) 58.443,23.343 58.443,23.242 57.55,22.35 *1.1
  Bottom Layer w0.2: v1(34.4,5.3) 35.6,4.1 41.1,4.1 41.9,4.9 41.9,11.4 44,13.5 53.1,13.5 58.5,18.9 v1(58.5,23.4)
IO9: C12.2 R15.1 SW2.1 U5.23 | length 30.3
  Top Layer w0.2: R15.1 14.075,3.775 15.475,3.775 C12.2 15.55,3.7 16.3,3.7 16.6,4 17.175,4 SW2.1 17.3,4.125 v1(17.3,5.8) ; v1(35.9,8.5) 35.9,9.7 36.3,10.1 U5.23
  Bottom Layer w0.2: v1(17.3,5.8) 20,8.5 v1(35.9,8.5)
MCU_MOTOR_A: U3.5 U5.19 | length 37.8
  Top Layer w0.2: U3.5 7.595,1.805 v1(7.6,1.8) ; v1(33.1,7.8) U5.19
  Bottom Layer w0.2: v1(7.6,1.8) 7.65,1.85 8.05,1.85 8.2,2 8.325,2.125 31.175,2.125 33.1,4.05 v1(33.1,7.8)
MCU_MOTOR_B: U3.6 U5.20 | length 38.4
  Top Layer w0.2: U3.6 8.874,3.527 8.874,1.659 v1(8.882,1.65) ; v1(33.9,7.8) U5.20
  Bottom Layer w0.2: v1(8.882,1.65) 9.333,1.2 31.9,1.2 33.9,3.2 v1(33.9,7.8)
MOTOR_OUT_A6: P1.1 U3.8 | length 15.6
  Top Layer w0.8: P1.1 2.6,2 3.9,0.7 10.931,0.7 11.4,1.169 11.4,3.531 U3.8
MOTOR_OUT_B6: P1.2 U3.2 | length 10.7
  Top Layer w0.8: v1(10,10.75) 10.135,10.615 U3.2
  Bottom Layer w0.8: P1.2@3,8.19 3.06,8.25 4.5,8.25 7.419,11.169 9.581,11.169 v1(10,10.75)
Net*1_2: *1.2 MT1.2 R1.2 | length 24.7
  Top Layer w0.2: MT1.2 47.5,9.4 v1(57.5,19.4) *1.2
  Bottom Layer w0.2: R1.2 56.5,20 57.1,19.4 v1(57.5,19.4)
Net*2_2: *2.2 MT1.A R2.2 | length 7.1
  Top Layer w0.2: MT1.A 55.5,19.5 *2.2
  Bottom Layer w0.2: R2.2 54.5,19.826 v1(55.128,19.198)
Net*3_2: *3.2 MT1.B R3.2 | length 9.4
  Top Layer w0.2: MT1.B 47.55,16.5 50.55,19.5 v1(52.5,19.5) 53.1,19.5 53.5,19.9 *3.2
  Bottom Layer w0.2: R3.2@52.45,20.6 R3.2 v1(52.5,19.5)
Net*4_2: *4.2 R14.1 | length 1.8
  Top Layer w0.2: R14.1 *4.2
NetD1_1: D1.1 P4.1 | length 5.4
  Top Layer w0.4: P4.1@50,33 50,31.8 52,29.8 D1.1
NetDZ1_1: DZ1.1 Q1.1 R18.2 | length 4.5
  Top Layer w0.2: Q1.1 9.75,31.015 9.75,31.75 9.425,32.075 DZ1.1 9.425,33.675 10,34.25 10,34.85 R18.2
NetDZ1_2: DZ1.2 Q1.3 Q2.2 Q3.2 R16.2 | length 11.4
  Top Layer w1.25: 12.185,29.5 Q2.2 12.62,26.95 13.52,26.05 Q3.2 ; DZ1.2 12.185,32.61 Q1.3 12.685,29.5 R16.2
NetDZ2_2: DZ2.2 Q3.1 R16.1 | length 5.4
  Top Layer w0.2: Q3.1 15.7,27.95 16.25,28.5 16.25,29.4 R16.1 18.925,29.5 DZ2.2
NetLED1_1: LED1.1 R11.2 | length 2
  Top Layer w0.5: R11.2 LED1.1
NetLED2_1: LED2.1 R13.2 | length 1.9
  Top Layer w0.2: LED2.1 R13.2
NetLED3_1: LED3.1 R14.2 | length 1.9
  Top Layer w0.2: LED3.1 R14.2
NetLED4_2: LED4.2 R17.1 | length 1.4
  Top Layer w0.2: LED4.2 R17.1
NetP2_1: P2.1 Q1.2 | length 6.9
  Top Layer w1.25: P2.1 4.143,26.643 6.643,26.643 9.05,29.05 Q1.2
NetQ2_1: Q2.1 Q3.3 R19.2 | length 9
  Top Layer w0.2: Q2.1 12.185,24.415 13,23.6 15.9,23.6 16.35,24.05 R19.2 17.068,24.5 17.185,24.617 Q3.3
NetR4_2: R4.2 U1.2 | length 2.8
  Bottom Layer w0.4: R4.2 24.1,30.9 25.52,32.32 25.52,32.79 U1.2
NetR5_1: R5.1 U2.1 U2.2 | length 3.1
  Top Layer w0.2: U2.2 U2.1 18.405,18.417 18.572,18.25 R5.1
NetR7_1: R7.1 U2.6 U2.7 | length 6.5
  Top Layer w0.2: U2.6 U2.7 17.135,15.035 17.3,15.2 18.65,15.2 20.1,13.75 R7.1
NetR9_2: R9.2 U5.22 | length 2.7
  Top Layer w0.2: R9.2 35.345,11.395 35.345,11.745 35.5,11.9 U5.22
NetR10_2: R10.2 U5.5 | length 4.7
  Top Layer w0.2: R10.2 21.9,19.7 23.3,19.7 23.6,19.4 U5.5
NetR13_1: R13.1 U5.13 | length 30.3
  Top Layer w0.2: R13.1 23.9,35.95 v1(23.9,35.1) ; U5.13 28.3,12.072 v1(28.336,12.036)
  Bottom Layer w0.2: v1(23.9,35.1) 22.7,35.1 21.45,33.85 21.45,18.85 28.264,12.036 v1(28.336,12.036)
QEI_A: R7.2 R8.2 U5.6 | length 8.8
  Top Layer w0.2: R7.2 R8.2 23.85,15.25 24.4,15.8 24.4,18.2 24.8,18.6 U5.6
QEI_B: R5.2 R6.2 U5.18 | length 18.4
  Top Layer w0.2: R5.2 R6.2 22.09,16.51 22.69,16.51 v1(23.1,16.1) ; v1@32.3,12.1 U5.18
  Bottom Layer w0.2: v1(23.1,16.1) 24,15.2 24,12.3 25.4,10.9 31.6,10.9 32.3,11.6 v1(32.3,12)
QEI_IN_A: P1.5 U2.5 | length 14.5
  Top Layer w0.2: v1(14.4,15.5) 14.4,15.419 14.595,15.224 U2.5
  Bottom Layer w0.2: P1.5@3,15.81 3.152,15.81 4.242,16.9 13,16.9 v1(14.4,15.5)
QEI_IN_B: P1.6 U2.3 | length 15.4
  Top Layer w0.2: v1(15.8,16.6) 15.832,16.632 15.832,18.431 U2.3
  Bottom Layer w0.2: P1.6@3,18.35 12.55,18.35 14.3,16.6 v1(15.8,16.6)
RX0: *2.1 P3.2 U5.30 | length 29.3
  Top Layer w0.2: U5.30 v1(40,18.6) ; *2.1 55.5,29.53 P3.2
  Bottom Layer w0.2: v1(40,18.6) 44.2,18.6 50.8,25.2 v1(55.5,25.2) ; P3.2@56.348,30.73 P3.2
SCL: U1.3 U5.16 | length 27
  Top Layer w0.2: v1@30.7,12.1 U5.16
  Bottom Layer w0.2: U1.3 28.021,32.751 27.351,32.751 24.7,30.1 24.7,18 v1(30.7,12)
SDA: U1.4 U5.21 | length 30.5
  Top Layer w0.2: v1@34.7,12.1 34.7,12.2 U5.21
  Bottom Layer w0.2: U1.4 28.21,30.4 25.6,30.4 25.1,29.9 25.1,21.6 v1(34.7,12)
TX0: *3.1 P3.3 U5.31 | length 30.7
  Top Layer w0.2: U5.31 v1(40,19.4) ; *3.1 53.5,30.07 P3.3
  Bottom Layer w0.2: v1(40,19.4) 42.83,19.4 50.33,26.9 v1(53.5,26.9)
USB_N: P4.2 U5.26 | length 27.3
  Top Layer w0.182: U5.26 38.403,15.4 38.515,15.512 38.515,15.538 38.622,15.645 40.083,15.645 41.409,16.972 41.409,29.809 42.291,30.691 48.398,30.691 49.18,31.472 49.18,32.355 49.35,32.525 P4.2@49.35,33.5
USB_P: P4.3 U5.27 | length 26.8
  Top Layer w0.182: U5.27 38.403,16.2 38.515,16.088 38.515,16.062 38.622,15.955 39.955,15.955 41.1,17.1 41.1,29.938 42.162,31 48.27,31 48.87,31.6 48.87,32.355 48.7,32.525 P4.3@48.7,33.5
pads on no net: P4. P4.4 SW1.2 SW1.4 SW2.2 SW2.4 U1.0 U5.4 U5.7 U5.9 U5.10 U5.15 U5.17 U5.24 U5.25 U5.28 U5.29 U5.32 U5.33 U5.34 U5.35

## Polygon pours and split planes (outlines as drawn)
GND on Top Layer "GND_L01_P000" (solid, remove dead copper, pour order 0): 0,38 59,38 59,0 0,0
GND on Int1 (GND) "GND_L02_P001" (solid, pour order 1): 0,38 59,38 59,0 0,0
GND on Int2 (PWR) "GND_L03_P002" (solid, pour order 2): 0,38 59,38 59,0 0,0
GND on Bottom Layer "GND_L04_P003" (solid, pour order 3): 0,38 59,38 59,0 0,0

## Silkscreen, mask and mechanical layers (free items; w line width, h text height)
Top Overlay:
  the board outline again, w0.254
  text "GND" at 53.05,35.35 h0.8
  text "Tx" at 53.38,32.88 h1
  text "Rx" at 53.48,30.28 h1
  text "3V3" at 53.05,27.85 h0.8
  text "Tx" at 52.63,24.01 h1
  text "Rx" at 54.68,23.98 h1
  text "SW" at 56.58,23.88 h1
  text "12V" at 0.504,21.754 h1.52
  text "IO9" at 14.12,0.32 h0.8
  text "EN" at 25.52,0.32 h0.8
  text "Sigma  / Finder / V1.0" at 32.875,0.15 h1.3
Bottom Overlay:
  drawing of 10 lines, arcs and shapes, not listed
  text "UdeS" at 13.408,27.337 h1.52
  text "Design by Emile Renaud - 07-2023" at 40.62,1.313 h1
Board:
  the board outline again, w0.254

## Text inside footprints (layer, text, board x,y; h text height)
P4: Mechanical 13 "PCB END" at 44,37.475 h0.41 r180
U3: Top Overlay "*" at 11.811,9.035 h0.8 r270; Mechanical 13 "*" at 10.656,7.93 h1.27 r270; Mechanical 7 "Default Padstyle: RX78Y21D0T" at 1.918,14.89 h1.27 r270; Mechanical 7 "Pin One Padstyle: RX78Y21D0T" at 0.394,14.89 h1.27 r270; Mechanical 7 "Heat Tab Padstyle: RX94Y126D0T" at -1.13,15.525 h1.27 r270; Mechanical 7 "Alt 1 Padstyle: OX60Y90D30P" at -4.178,14.573 h1.27 r270; Mechanical 7 "Alt 2 Padstyle: OX90Y60D30P" at -5.702,14.573 h1.27 r270; Mechanical 7 "0.157in/3.988mm" at 14.415,8.381 h0.64 r270; Mechanical 7 "0.244in/6.198mm" at 16.32,8.381 h0.64 r270; Mechanical 7 "0.197in/5.004mm" at 9.182,0.958 h0.64 r270; Mechanical 7 "0.05in/1.27mm" at 10.452,15.639 h0.64 r270; Mechanical 7 "0.05in/1.27mm" at 3.95,10.528 h0.64 r270
U5: Top Overlay "*" at 25.041,22.746 h0.8; Mechanical 13 "*" at 26.743,22.365 h1.27